# Altium PCB Take 3 85 X 80mm.PcbDoc
Units mm, origin at the board's own origin, x right, y up, seen from the top; angles counter-clockwise.
Board outline 85 x 80 mm, 4 copper layers (Top Layer, Internal Plane 1, Internal Plane 2, Bottom Layer), stack 1.782 mm thick; 108 components, 64 nets, 310 pads, 0 vias.
Unrouted connection lines stored in the file: 207.
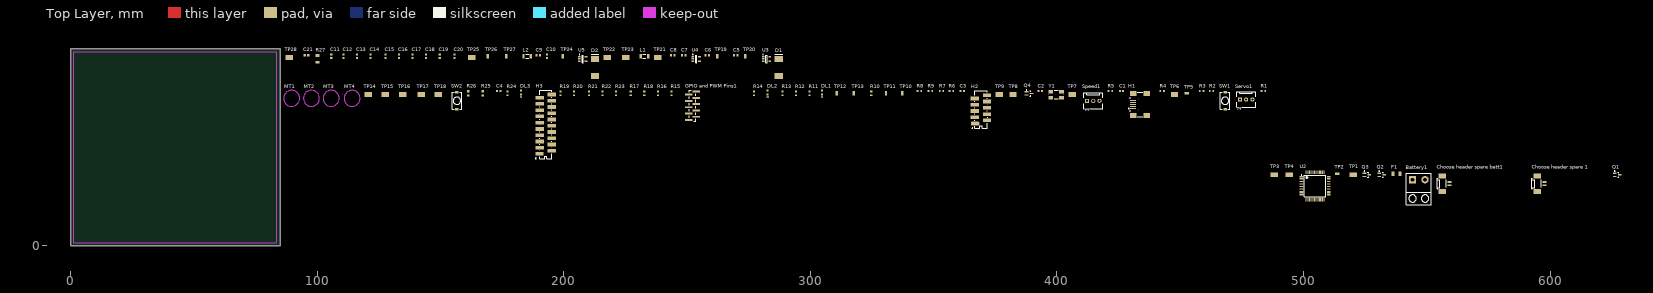
[diagram p0: Top Layer view]
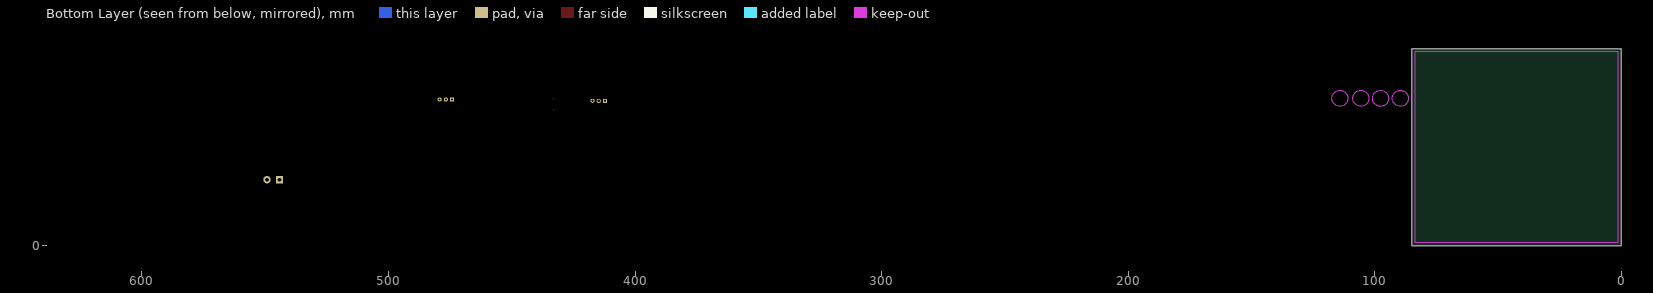
[diagram p1: Bottom Layer view, seen from below]
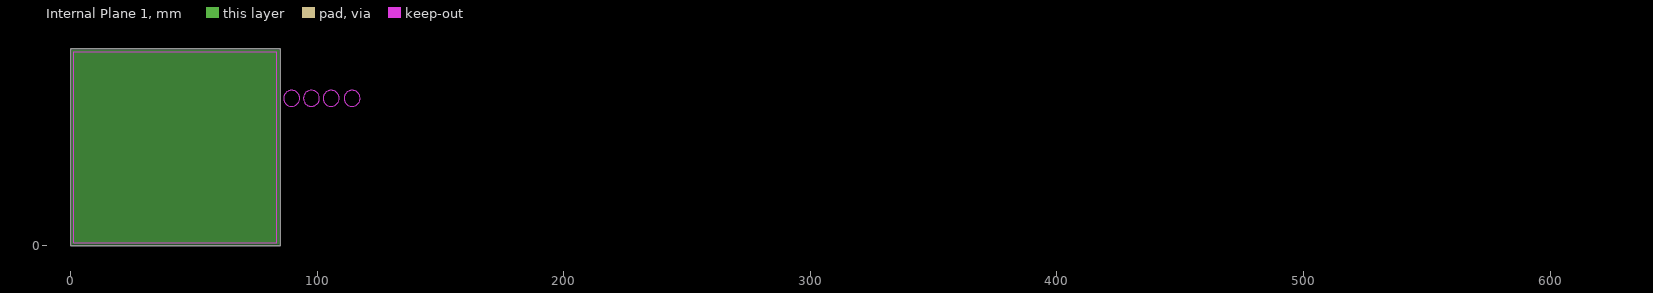
[diagram p2: Internal Plane 1, clearances drawn from the general rule]
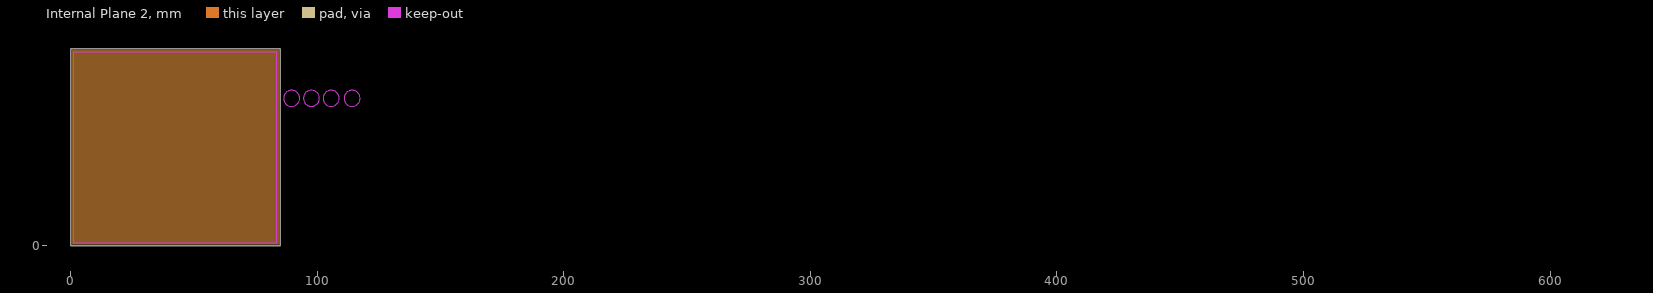
[diagram p3: Internal Plane 2, clearances drawn from the general rule]

## Layer stack, top to bottom
Top Solder: solder mask 0.0102, Solder Resist, Dk 3.5
Top Layer: signal copper 0.0356
Dielectric1: prepreg 0.32, FR-4, Dk 4.8
Internal Plane 1: plane copper 0.0356
Dielectric2: core 1, FR-4, Dk 4.8
Internal Plane 2: plane copper 0.0356
Dielectric3: prepreg 0.32, FR-4, Dk 4.8
Bottom Layer: signal copper 0.0356
Bottom Solder: solder mask 0.0102, Solder Resist, Dk 3.5

## Board outline
0,0 85,0 85,80 0,80

## Design rules (kind name [scope] priority, off if disabled: settings)
Clearance Min_Clearance_Circuit_Labs [All] p1: gap=0.15
DiffPairsRouting [All] p1: maxlimit=0.254 minlimit=0.254 mostfreqgap=0.254 toplayer_minwidth=0.381 toplayer_maxwidth=0.381 toplayer_prefwidth=0.381 bottomlayer_minwidth=0.381 bottomlayer_maxwidth=0.381 bottomlayer_prefwidth=0.381 maxuncoupledlength=12.7
FanoutControl Fanout_BGA [IsBGA] p1 off: bgadir=Out bgaviamode=Centered fanoutstyle=Auto fanoutdirection=Alternating viagrid=0.025 // Fanout_BGA (Default Rule)
HoleSize [All] p1: absolutevalues=TRUE maxlimit=10 minlimit=0.3 maxpercent=80.000 minpercent=20.000
MinimumAnnularRing [All] p1: minimumring=0.1
MinimumSolderMaskSliver [All] p1: minsoldermaskwidth=0.25
NetAntennae [All] p1: netantennaetolerance=1
PasteMaskExpansion [All] p1 off: expansion=0.2
PlaneClearance [All] p1: clearance=0.508
PlaneConnect [All] p1: planeconnectstyle=Relief reliefexpansion=0.508 reliefentries=4 reliefconductorwidth=0.254 reliefairgap=0.254
PolygonConnect [All] p1: connectstyle=Relief reliefconductorwidth=0.254 reliefentries=4 polygonreliefangle="90 Angle" airgapwidth=0.254
RoomDefinition MotorBoard_PowerDistribution [InComponentClass('MotorBoard_PowerDistribution')] p1: confinementstyle=ConfineIn formatcopy=TRUE lockcomponents=FALSE outline 86.2,67.3 289.199,67.3 289.199,80.8 86.2,80.8
RoomDefinition MotorBoard [InComponentClass('MotorBoard')] p2: confinementstyle=ConfineIn formatcopy=TRUE lockcomponents=FALSE outline 85.7,13.3 629.699,13.3 629.699,66.3 85.7,66.3
RoutingVias [All] p1: holewidth=0.5 width=1 viastyle="Through Hole" minholewidth=0.3 minwidth=0.6 maxholewidth=1 maxwidth=2
SMDNeckDown [All] p1 off: percent=50.000
SMDToCorner [All] p1: distance=98425
SMDToPlane [All] p1: distance=1968504
SilkToSolderMaskClearance SilkscreenOverComponentPads [IsPad] p1: minsilkscreentomaskgap=0.254 clearancetoexposedcopper=TRUE
SolderMaskExpansion [All] p1: expansion=0.102
ViasUnderSMD [All] p1: allowed=FALSE
Width [All] p1: maxlimit=2 minlimit=0.15 preferedwidth=0.3
21 further rules are at their usual default settings.

## Classes and differential pairs
net class Y1_Nets: NetC1_2 NetC2_2
net class U5_Nets: +3V3 +5V GND
net class U4_Nets: GND NetU2_38 NetU4_4 "SERVO POWER" VBAT
net class U3_Nets: GND NetD1_1 NetU3_4 VBAT
net class U2_Nets: +3V3 ERASE GND IR "IR SLEEP" LED1 LED2 LED3 NetC1_2 NetC2_2 NetC20_2 NetR2_1 NetR3_2 NetR4_2 NetR6_2 NetR8_2 NetTP7_1 NetTP9_1 NetU2_3 NetU2_4 NetU2_5 NetU2_9 NetU2_11 NetU2_13 NetU2_14 NetU2_19 NetU2_32 NetU2_34 NetU2_37 NetU2_38 NetU2_42 NetU2_59 NetU2_63 NRST P1 P2 P3 PWM1 PWM2 SCL SDA SPARE SPARE2 SPIN1 SPIN2 SPIN3 TCK TDI TDO TMS "USB DETECT" VDDOUT
net class U1_Nets: GND IR NetQ1_2 NetU1_2
net class TP28_Nets: GND
net class TP27_Nets: GND
net class TP26_Nets: GND
net class TP25_Nets: GND
net class TP24_Nets: +3V3
net class TP23_Nets: VDDOUT
net class TP22_Nets: +3V3
net class TP21_Nets: VBUS
net class TP20_Nets: VBAT
net class TP19_Nets: VBAT
net class TP18_Nets: TDI
net class TP17_Nets: TMS
net class TP16_Nets: TCK
net class TP15_Nets: TDO
net class TP14_Nets: NRST
net class TP13_Nets: SDA
net class TP12_Nets: NetR8_2
net class TP11_Nets: GND
net class TP10_Nets: SCL
net class TP9_Nets: NetTP9_1
net class TP8_Nets: USB_P
net class TP7_Nets: NetTP7_1
net class TP6_Nets: USB_N
net class TP5_Nets: NetR2_1
net class TP4_Nets: ERASE
net class TP3_Nets: +3V3
net class TP2_Nets: NetQ1_2
net class TP1_Nets: IR
net class SW2_Nets: GND NRST
net class SW1_Nets: GND NetR2_2
net class Speed1_Nets: GND NetQ4_2 PWM2
net class Servo1_Nets: GND NetR1_1 "SERVO POWER"
net class R27_Nets: NetC20_2 NetC21_2
net class R26_Nets: GND "USB DETECT"
net class R25_Nets: "USB DETECT" VBUS
net class R24_Nets: GND NetDL3_1
net class R23_Nets: +3V3 TDI
net class R22_Nets: +3V3 TMS
net class R21_Nets: +3V3 TCK
net class R20_Nets: +3V3 TDO
net class R19_Nets: +3V3 NRST
net class R18_Nets: "NetGPIO and PWM Pins1_5" SPIN2
net class R17_Nets: "NetGPIO and PWM Pins1_6" SPIN3
net class R16_Nets: GND NetDL2_1
net class R15_Nets: "NetGPIO and PWM Pins1_4" SPIN1
net class R14_Nets: "NetGPIO and PWM Pins1_3" P3
net class R13_Nets: "NetGPIO and PWM Pins1_2" P2
net class R12_Nets: "NetGPIO and PWM Pins1_1" P1
net class R11_Nets: GND NetDL1_1
net class R10_Nets: GND NetR8_2
net class R9_Nets: NetQ4_3 VBAT
net class R8_Nets: NetR8_2 VBAT
net class R7_Nets: NetR6_2 SDA
net class R6_Nets: NetR6_2 SCL
net class R5_Nets: NetR5_1 PWM2
net class R4_Nets: NetR4_2 USB_N
net class R3_Nets: NetR3_2 USB_P
net class R2_Nets: NetR2_1 NetR2_2
net class R1_Nets: NetR1_1 PWM1
net class Q4_Nets: NetQ4_1 NetQ4_2 NetQ4_3
net class Q3_Nets: "NetChoose header spare batt1_2" SPARE VBAT
net class Q2_Nets: "NetChoose header spare 1_2" "SERVO POWER" SPARE2
net class Q1_Nets: +3V3 "IR SLEEP" NetQ1_2
net class L2_Nets: NetC20_2 VDDOUT
net class L1_Nets: NetD2_1 VBUS
net class H3_Nets: +3V3 GND NetH3_3 NetH3_11 NetH3_17 NetH3_19 NRST TCK TDI TDO TMS
net class H2_Nets: +5V GND NetH2_3 NetH2_4 NetH2_9 NetH2_10 SCL SDA
net class H1_Nets: GND NetH1_4 USB_N USB_P VBUS
net class "GPIO and PWM Pins1_Nets": GND "NetGPIO and PWM Pins1_1" "NetGPIO and PWM Pins1_2" "NetGPIO and PWM Pins1_3" "NetGPIO and PWM Pins1_4" "NetGPIO and PWM Pins1_5" "NetGPIO and PWM Pins1_6"
net class F1_Nets: NetBattery1_1 VBAT
net class DL3_Nets: LED3 NetDL3_1
net class DL2_Nets: LED2 NetDL2_1
net class DL1_Nets: LED1 NetDL1_1
net class D2_Nets: +5V NetD2_1
net class D1_Nets: +5V NetD1_1
net class "Choose header spare batt1_Nets": GND "NetChoose header spare batt1_2"
net class "Choose header spare 1_Nets": GND "NetChoose header spare 1_2"
net class C21_Nets: GND NetC21_2
net class C20_Nets: GND NetC20_2
net class C19_Nets: GND VDDOUT
net class C18_Nets: GND VDDOUT
net class C17_Nets: GND VDDOUT
net class C16_Nets: GND VDDOUT
net class C15_Nets: +3V3 GND
net class C14_Nets: +3V3 GND
net class C13_Nets: +3V3 GND
net class C12_Nets: +3V3 GND
net class C11_Nets: +3V3 GND
net class C10_Nets: +3V3 GND
net class C9_Nets: +5V GND
net class C8_Nets: GND "SERVO POWER"
net class C7_Nets: +5V GND
net class C6_Nets: GND VBAT
net class C5_Nets: GND VBAT
net class C4_Nets: +3V3 GND
net class C3_Nets: +5V GND
net class C2_Nets: GND NetC2_2
net class C1_Nets: GND NetC1_2
net class Battery1_Nets: GND NetBattery1_1
component class MotorBoard: Battery1 C1 C2 C3 C4 "Choose header spare 1" "Choose header spare batt1" DL1 DL2 DL3 F1 "GPIO and PWM Pins1" H1 H2 H3 MT1 MT2 MT3 MT4 Q1 Q2 Q3 Q4 R1 R2 R3 R4 R5 R6 R7 R8 R9 R10 R11 R12 R13 R14 R15 R16 R17 R18 R19 R20 R21 R22 R23 R24 R25 R26 Servo1 Speed1 SW1 SW2 TP1 TP2 TP3 TP4 TP5 TP6 TP7 TP8 TP9 TP10 TP11 TP12 TP13 TP14 TP15 TP16 TP17 TP18 U1 U2 Y1
component class MotorBoard_PowerDistribution: C5 C6 C7 C8 C9 C10 C11 C12 C13 C14 C15 C16 C17 C18 C19 C20 C21 D1 D2 L1 L2 R27 TP19 TP20 TP21 TP22 TP23 TP24 TP25 TP26 TP27 TP28 U3 U4 U5
differential pair USB: +USB_P -USB_N

## Components (designator, comment, footprint, x,y, rotation, side; value= is the part's Value field where it differs from the comment)
Battery1 "JA_TERM_BLK_HDR_2 PIN" TMHDR2 544.199,26.8 r0 top
C1 "10pF" CAPC1608L 426.199,62.8 r0 top
C2 "10pF" CAPC1608L 393.199,62.8 r0 top
C3 "100nF" CAPC1608L 361.699,62.8 r0 top
C4 "100nF" CAPC1608L 173.7,62.8 r0 top
C5 "10uF" CAPC1608L 269.699,77.3 r0 top
C6 "10uF" CAPC1608L 258.199,77.3 r0 top
C7 "10uF" CAPC1608L 248.699,77.3 r0 top
C8 "10uF" CAPC1608L 244.199,77.3 r0 top
C9 "10uF" CAPC1608L 189.7,77.3 r0 top
C10 "10uF" CAPC1608L 193.2,76.8 r90 top
C11 "100nF" CAPC1608L 105.7,76.8 r90 top
C12 "100nF" CAPC1608L 110.7,76.8 r90 top
C13 "100nF" CAPC1608L 116.2,76.8 r90 top
C14 "100nF" CAPC1608L 121.7,76.8 r90 top
C15 "100nF" CAPC1608L 127.7,76.8 r90 top
C16 "100nF" CAPC1608L 133.2,76.8 r90 top
C17 "100nF" CAPC1608L 138.7,76.8 r90 top
C18 "100nF" CAPC1608L 144.2,76.8 r90 top
C19 "100nF" CAPC1608L 149.7,76.8 r90 top
C20 "100nF" CAPC1608L 155.7,76.8 r90 top
C21 "4.7uF" CAPC1608N 95.7,77.3 r0 top
"Choose header spare 1" "" SD-53261-0219 597.699,25.8 r90 top
"Choose header spare batt1" "Value" SD-53261-0219 559.199,25.8 r90 top
D1 "VS-30BQ015TRPBF" SMC 287.199,72.3 r90 top
D2 "VS-30BQ015TRPBF" SMC 212.699,72.3 r90 top
DL1 "Dark Green" WL-SMCW0603 304.699,61.3 r90 top
DL2 "Yellow" WL-SMCW0603 282.699,61.3 r90 top
DL3 "Red" WL-SMCW0603 182.7,61.3 r90 top
F1 "5A" RESC3216N 537.699,29.3 r0 top
"GPIO and PWM Pins1" "HDR SIL SMT" M52-040000P1045 252.199,56.8 r90 top
H1 "JS_USB_MINI_B" USB/SM0.8-6H5 438.699,57.3 r0 top
H2 "I2C" 188275-10 369.199,55.3 r90 top
H3 "ARM JTAG" 188275-20 192.7,49.3 r90 top
L1 "Ferrite Bead" INDC3216L 232.699,76.8 r0 top
L2 "Ferrite Bead" INDC3216L 185.2,76.8 r0 top
MT1 "M3.2 NPTH" MNT-HOLE_3.2mm_NPTH 89.7,59.8 r0 top
MT2 "M3.2 NPTH" MNT-HOLE_3.2mm_NPTH 97.7,59.8 r0 top
MT3 "M3.2 NPTH" MNT-HOLE_3.2mm_NPTH 105.7,59.8 r0 top
MT4 "M3.2 NPTH" MNT-HOLE_3.2mm_NPTH 114.2,59.8 r0 top
Q1 "BC817W" SOT323_M 627.199,28.8 r0 top
Q2 "BC817W" SOT323_M 531.699,28.8 r0 top
Q3 "BC817W" SOT323_M 525.699,28.8 r0 top
Q4 "BC817W" SOT323_M 388.699,61.8 r0 top
R1 "220R" RESC1608L 483.699,62.8 r0 top
R2 "2K2" RESC1608L 462.699,62.8 r0 top
R3 "27R" RESC1608L 458.699,62.8 r0 top
R4 "27R" RESC1608L 442.699,62.8 r0 top
R5 "220R" RESC1608L 421.699,62.8 r0 top
R6 "2K2" RESC1608L 357.199,62.8 r0 top
R7 "2K2" RESC1608L 353.199,62.8 r0 top
R8 "160K" RESC1608L 344.199,62.8 r0 top
R9 "220R" RESC1608L 348.699,62.8 r0 top
R10 "#NAME?" RESC1608L 324.699,61.8 r90 top
R11 "62R" RESC1608L 299.699,61.8 r90 top
R12 "220R" RESC1608L 294.199,61.8 r90 top
R13 "220R" RESC1608L 288.699,61.8 r90 top
R14 "220R" RESC1608L 277.199,61.8 r90 top
R15 "220R" RESC1608L 243.699,61.8 r90 top
R16 "220R" RESC1608L 238.199,61.8 r90 top
R17 "220R" RESC1608L 227.199,61.8 r90 top
R18 "220R" RESC1608L 232.699,61.8 r90 top
R19 "100K" RESC1608L 198.7,61.8 r90 top
R20 "100K" RESC1608L 204.199,61.8 r90 top
R21 "100K" RESC1608L 210.199,61.8 r90 top
R22 "100K" RESC1608L 215.699,61.8 r90 top
R23 "100K" RESC1608L 221.199,61.8 r90 top
R24 "220R" RESC1608L 177.2,61.8 r90 top
R25 "27K" RESC1608N 167.2,61.8 r90 top
R26 "47K" RESC1608N 161.2,61.8 r90 top
R27 "1R" RESC3216L 100.2,75.8 r90 top
Servo1 "3 Pin Molex KK Hdr" MOLEX_KK_3_HDR 474.199,59.3 r0 top
Speed1 "3 Pin Molex KK Hdr" MOLEX_KK_3_HDR 412.199,58.8 r0 top
SW1 "Sleep/Wake Up" KSR211G 468.199,55.3 r90 top
SW2 "Reset" KSR211G 156.7,55.3 r90 top
TP1 "Gnd" TP_0805 520.199,28.8 r0 top
TP2 "TP_0603" TP_0603 513.699,29.3 r0 top
TP3 "3V3" TP_0805 488.199,28.8 r0 top
TP4 "Erase" TP_0805 494.199,28.8 r0 top
TP5 "TP_0603" TP_0603 452.699,61.8 r0 top
TP6 "USB_N" TP_0805 447.699,61.3 r0 top
TP7 "PA15" TP_0805 406.199,61.3 r0 top
TP8 "USB_P" TP_0805 382.199,61.3 r0 top
TP9 "PA11" TP_0805 376.699,61.3 r0 top
TP10 "TP_0603" TP_0603 337.199,61.8 r90 top
TP11 "TP_0603" TP_0603 330.699,61.8 r90 top
TP12 "TP_0603" TP_0603 310.699,61.8 r90 top
TP13 "TP_0603" TP_0603 317.699,61.8 r90 top
TP14 "nRST" TP_0805 120.7,61.3 r0 top
TP15 "TDO" TP_0805 127.7,61.3 r0 top
TP16 "TCK" TP_0805 134.7,61.3 r0 top
TP17 "TMS" TP_0805 142.2,61.3 r0 top
TP18 "TDI" TP_0805 149.2,61.3 r0 top
TP19 "TP_0603" TP_0603 262.199,76.8 r90 top
TP20 "TP_0603" TP_0603 273.699,76.8 r90 top
TP21 "V_Bus" TP_0805 238.199,76.3 r0 top
TP22 "3V3" TP_0805 217.699,76.3 r0 top
TP23 "VddOut" TP_0805 225.199,76.3 r0 top
TP24 "TP_0603" TP_0603 199.699,76.8 r90 top
TP25 "Gnd" TP_0805 162.7,76.3 r0 top
TP26 "TP_0603" TP_0603 169.2,76.8 r90 top
TP27 "TP_0603" TP_0603 176.7,76.8 r90 top
TP28 "Gnd" TP_0805 88.7,76.3 r0 top
U2 "ATSAM4S8BA-ANR" LQFP64_L 504.699,24.3 r0 top
U3 "UC385 7.5 to 6 (max)" SOT95P280X145-5N 282.199,75.8 r0 top
U4 "UC385 7.5 to 6 (max)" SOT95P280X145-5N 253.699,75.8 r0 top
U5 "TLV70233DBVR" SOT95P280X145-5N 207.699,75.8 r0 top
Y1 "18.432MHz" 6.0X3.5-4 399.699,61.3 r0 top

## Footprints (in the part's own frame and the unit in brackets; to place one, negate y for a bottom-side part, rotate by r counter-clockwise, add the part's x,y. Pads: shape width x height; smd on the part's side, far side on the other; paste and mask are expansions set on the pad)
6.0X3.5-4 [mm] "4 SMD 6.0X3.5 mm No Lead Crystal"
  rect 1.9x1.4 smd: 1(-2.2,-1.2) 2(2.2,-1.2) 3(2.2,1.2) 4(-2.2,1.2)
  silkscreen extent -3,-1.75 3,1.75, body extent -3,-1.75 3,1.75, height 1.2
188275-10 [mm] "MicroMatch Ribbon Connector 10 way"
  rrect50% 1.5x3.4 smd: 1(-5.724,2.385)
  rect 1.5x3.4 smd: 2(-4.445,-2.461) 3(-3.175,2.461) 4(-1.905,-2.461) 5(-0.635,2.461) 6(0.635,-2.461) 7(1.905,2.461) 8(3.175,-2.461) 9(4.445,2.461) 10(5.715,-2.461)
  silkscreen extent -7.74,-2.55 7.62,3.57, body extent -7.62,-2.5 7.64,2.43, height 8.45
188275-20 [mm] "MicroMatch Ribbon Connector 20 way"
  rrect50% 1.5x3.4 smd: 1(-12,2.5)
  rect 1.5x3.4 smd: 2(-10.795,-2.461) 3(-9.525,2.461) 4(-8.255,-2.461) 5(-6.985,2.461) 6(-5.715,-2.461) 7(-4.445,2.461) 8(-3.175,-2.461) 9(-1.905,2.461) 10(-0.635,-2.461) 11(0.635,2.461) 12(1.905,-2.461) 13(3.175,2.461) 14(4.445,-2.461) 15(5.715,2.461) 16(6.985,-2.461) 17(8.255,2.461) 18(9.525,-2.461) 19(10.795,2.461) 20(12.065,-2.461)
  silkscreen extent -14.06,-2.54 13.83,4.16, body extent -13.96,-2.54 13.93,2.46, height 8.45
CAPC1608L [mm] "Chip Capacitor, Body 1.6x0.8mm, IPC High Density"
  rect 0.8x0.9 smd: 1(-0.7,0) 2(0.7,0)
  body extent -0.87,-0.48 0.87,0.48, height 0.85
CAPC1608N [mm] "Chip Capacitor, Body 1.6x0.8mm, IPC Medium Density"
  rect 1x1 smd: 1(-0.8,0) 2(0.8,0)
  body extent -0.87,-0.48 0.87,0.48, height 0.85
INDC3216L [mm] "Chip Inductor, Body 3.2x1.6mm, IPC High Density"
  rect 1x1.8 smd: 1(-1.5,0) 2(1.5,0)
  silkscreen extent -0.55,-0.8 0.55,0.8, body extent -1.75,-0.95 1.75,0.95, height 1.9
KSR211G [mm] "Subminature Tactile Switch in SMT"
  rect 1x1.4 smd: 1(0,0) 2(7,0)
  silkscreen extent 0,-1.9 7,2, body extent 0,-1.9 7,2, height 4.25
LQFP64_L [mm] "Thin QFP, 64-Leads, Body 10x10mm, Pitch 0.5mm, IPC High Density"
  oval 1.55x0.25 smd mask+0.07: 1(-5.525,3.75) 2(-5.525,3.25) 3(-5.525,2.75) 4(-5.525,2.25) 5(-5.525,1.75) 6(-5.525,1.25) 7(-5.525,0.75) 8(-5.525,0.25) 9(-5.525,-0.25) 10(-5.525,-0.75) 11(-5.525,-1.25) 12(-5.525,-1.75) 13(-5.525,-2.25) 14(-5.525,-2.75) 15(-5.525,-3.25) 16(-5.525,-3.75) 33(5.525,-3.75) 34(5.525,-3.25) 35(5.525,-2.75) 36(5.525,-2.25) 37(5.525,-1.75) 38(5.525,-1.25) 39(5.525,-0.75) 40(5.525,-0.25) 41(5.525,0.25) 42(5.525,0.75) 43(5.525,1.25) 44(5.525,1.75) 45(5.525,2.25) 46(5.525,2.75) 47(5.525,3.25) 48(5.525,3.75)
  oval 0.25x1.55 smd mask+0.07: 17(-3.75,-5.525) 18(-3.25,-5.525) 19(-2.75,-5.525) 20(-2.25,-5.525) 21(-1.75,-5.525) 22(-1.25,-5.525) 23(-0.75,-5.525) 24(-0.25,-5.525) 25(0.25,-5.525) 26(0.75,-5.525) 27(1.25,-5.525) 28(1.75,-5.525) 29(2.25,-5.525) 30(2.75,-5.525) 31(3.25,-5.525) 32(3.75,-5.525) 49(3.75,5.525) 50(3.25,5.525) 51(2.75,5.525) 52(2.25,5.525) 53(1.75,5.525) 54(1.25,5.525) 55(0.75,5.525) 56(0.25,5.525) 57(-0.25,5.525) 58(-0.75,5.525) 59(-1.25,5.525) 60(-1.75,5.525) 61(-2.25,5.525) 62(-2.75,5.525) 63(-3.25,5.525) 64(-3.75,5.525)
  silkscreen extent -5.65,-4.35 4.35,4.55, body extent -5,-5 5,5, height 1.6
M52-040000P1045 [mm] "1.27mm SIL SMT 10 way Pin Header"
  rect 0.74x3 smd: 1(-5.724,1.51) 2(-4.452,-1.51) 3(-3.18,1.51) 4(-1.908,-1.51) 5(-0.636,1.51) 6(0.636,-1.51) 7(1.908,1.51) 8(3.18,-1.51) 9(4.531,1.51) 10(5.724,-1.51)
  silkscreen extent -6.36,-1.27 6.36,1.27, body extent -6.36,-1.27 6.36,1.27, height 7.77
MNT-HOLE_3.2mm_NPTH [mm] "Mounting Hole 3.2mm non plated"
  round 0 hole 3.2 unplated: 1(0,0)
  Keep-Out Layer circle w0.254: c0,0 r3.25
MOLEX_KK_3_HDR [mil] "MOLEX_KK_3_HDR"
  rect 65x65 hole 35.43: 1(0,0)
  round 65 hole 35.43: 2(100,0) 3(200,0)
  silkscreen extent -50,-125 250,125, body extent -44,-120 244,119, height 630
RESC1608L [mm] "Chip Resistor, Body 1.6x0.8mm, IPC High Density"
  rect 0.7x0.9 smd: 1(-0.75,0) 2(0.75,0)
  body extent -0.85,-0.48 0.85,0.48, height 0.9
RESC1608N [mm] "Chip Resistor, Body 1.6x0.8mm, IPC Medium Density"
  rect 0.9x1 smd: 1(-0.85,0) 2(0.85,0)
  body extent -0.85,-0.48 0.85,0.48, height 0.6
RESC3216L [mm] "Chip Resistor, Body 3.1x1.6mm, IPC High Density"
  rect 1.1x1.7 smd: 1(-1.35,0) 2(1.35,0)
  body extent -1.68,-0.87 1.68,0.87, height 2.54
RESC3216N [mm] "Chip Resistor, Body 3.2x1.6mm, IPC Medium Density"
  rect 1.3x1.8 smd: 1(-1.45,0) 2(1.45,0)
  body extent -1.68,-0.87 1.68,0.87, height 0.71
SD-53261-0219 [mm] "Molex Pico Blade 2 Pos Horiz SMD Header"
  rect 0.8x1.6 smd: 1(0,0) 2(-1.25,0)
  rect 2.1x3 smd: M(-3.8,2.9) M(2.55,2.9)
  silkscreen extent -2.75,1.25 1.5,5.05, body extent -2.66,1.13 1.41,4.95, height 3.45
SMC [mm] "DO-214-AB/SMC; 2 C-Bend Leads; Body 7.9 x 5.9 mm, inc. leads (LxW)"
  rect 2.4x3.3 smd: 1(-3.475,0) 2(3.475,0)
  silkscreen extent 5.43,-1.6 5.43,1.6
SOT95P280X145-5N [mm] "SOT23, 5-Leads, Body 2.90x2.80mm, Pitch 0.95mm, IPC Medium Density"
  rect 1.05x0.6 smd: 1(-1.35,0.95) 2(-1.35,0) 3(-1.35,-0.95) 4(1.35,-0.95) 5(1.35,0.95)
  silkscreen extent -1.47,-1.55 0.25,1.92, body extent -0.87,-1.52 0.87,1.53, height 1.45
SOT323_M [mm] "SOT323, 3-Leads, Body 2.0x1.3mm, Pitch 0.65mm, Lead Span 2.1mm, IPC Low Density"
  rect 1.5x0.5 smd: 1(-1,0.65) 2(-1,-0.65) 3(1,0)
  silkscreen extent -1.12,-1.1 0.7,1.57, body extent -0.7,-1.1 0.7,1.1, height 1.1
TMHDR2 [mm] "5.08mm Pluggable Terminal Header"
  rect 3x3 hole 1.5: 1(0,0)
  round 3 hole 1.5: 2(5.08,0)
  silkscreen extent -2.54,-10.16 7.62,2.54, body extent -2.43,-10.07 7.51,2.42, height 7.8
TP_0603 [mm] "TestPoint 0603"
  rect 1.8x1 smd: 1(0,0)
  body extent -1,-0.6 1,0.6, height 0.9
TP_0805 [mm] "TestPoint SMD"
  rect 3x2 smd: 1(0,0)
  body extent -1.5,-1 1.5,1.1, height 1.4
USB/SM0.8-6H5 [mm] "Connector; USB2.0, Type B, SM; 5 Position; Right Angle"
  rect 2.3x0.5 smd mask+0.07: 1(-7.85,-1.6) 2(-7.85,-0.8) 3(-7.85,0) 4(-7.85,0.8) 5(-7.85,1.6)
  rect 2.5x2 smd: 6(-7.75,4.45) 7(-2.25,4.45) 8(-7.75,-4.45) 9(-2.25,-4.45)
  round 0.6 hole 0.9 unplated: MH1(-5.25,2.2) MH2(-5.25,-2.2)
  silkscreen extent -9.67,-4.95 -3.95,4.95, body extent -8.9,-4.95 0.7,4.95, height 3.9
WL-SMCW0603 [mm] "2.4 x 0.8 x 0.7mm LED"
  rect 0.8x0.8 smd: 1(0,0) 2(1.6,0)
  silkscreen extent -0.85,-0.35 -0.85,0.35

## Part data
Battery1: "TERM_BLK_HEADER 5.08mm 2 Pos R/A Thru Hole"
C1 C2: library part CC_10pF_0603, "CAP CER 10pF COG/NPO 50V 0603"
C3 C4 C11 C12 C13 C14 C15 C16 C17 C18 C19 C20: library part CC_100nF_0603, "CAP CER 100nF X7R +-10% 50V 0603"
C5 C6 C7 C8 C9 C10: library part CC_10uF_0603, "CAP CER 10UF X5R +-20% 10V 0603"
C21: library part CC_4.7uF_0603, "CAP CER 4.7uF X5R +-20%  10V 0603"
"Choose header spare 1": library part JB_53261-02
"Choose header spare batt1": library part JB_53261-02, "Header_Horiz_2Pos_1.25mm_125V@1A_SMT"
D1 D2: library part DS_VS-30BQD015TRPBF, "DIODE SCHOTTKY 15V 3A SMC"
DL1: library part DL_150060GS75000, "LED Dk Green 430mcd 0603 SMD"
DL2: library part DL_150060YS75000, "LED Yellow 120mcd 0603 SMD"
DL3: library part DL_150060RS75000, "LED Red 250mcd 0603 SMD"
F1: library part FS_Fuse_5.0A, "Fuse 5.0A Very Fast Acting 1206 SMD"
"GPIO and PWM Pins1": library part JB_M52H_10_1.27, "Header 1.27mm Pitch SIL 10 Way SMT"
H1: library part JS_USB_MINI_B_SMT, "USB 2.0, Right Angle, SMT, B Type, Receptacle, 5 Position,"
H2: library part JB_HDR_IDC_5X2_VERT, "IDC Header, 1,27mm, 10-Pin, Vert, SMT"
H3: library part JB_HDR_IDC_10X2_VERT, "IDC Header, 1,27mm, 20-Pin, Vert, SMT"
L1 L2: library part IN_Ferrite-Bead, "Ferrite Bead, Rdc 0.3R, Z100MHZ 600R, Imax 1A, SMD 1206"
MT1 MT2 MT3 MT4: library part MC_M3.2_HOLE, "Fixing M3.2 Mount Hole NPTH"
Q1 Q2 Q3 Q4: library part TB_BC817W, "NPN GP Bipolar Transistor 45V 500mA SOT323"
R1 R5 R9 R12 R13 R14 R15 R16 R17 R18 R24: library part RS_220R, "RES 220 OHM 1/10W 5% 0603 SMD"
R2 R6 R7: library part RS_2K2, "RES 2.2K OHM 1/10W 5% 0603 SMD"
R3 R4: library part RS_27R, "RES 27 OHM 1/10W 5% 0603 SMD"
R8: library part RS_160K, "RES 160K OHM 1/10W 5% 0603 SMD"
R10: library part RS_130K, "RES 130K OHM 1/10W 5% 0603 SMD"
R11: library part RS_62R, "RES 62 OHM 1/10W 5% 0603 SMD"
R19 R20 R21 R22 R23: library part RS_100K, "RES 100K OHM 1/10W 5% 0603 SMD"
R25: library part RS_27K, "RES 27K OHM 1/10W 5% 0603 SMD"
R26: library part RS_47K, "RES 47.0K OHM 1/10W 5% 0603 SMD"
R27: library part RT_1R, "RES 1R OHM 1/4W 5% 1206 SMD"
Servo1 Speed1: library part JA_MOLEX_KK_3POS, "CONN HEADER 3POS 2.54mm VERT_Thru Hole"
SW1 SW2: library part "WS_KSR211G LFS", "SWITCH TACTILE SPST-NO SMD"
TP1 TP3 TP4 TP6 TP7 TP8 TP9 TP14 TP15 TP16 TP17 TP18 TP21 TP22 TP23 TP25 TP28: library part TP_0805, "Test Point 2.0X0.9X1.2mm SMD"
TP2 TP5 TP10 TP11 TP12 TP13 TP19 TP20 TP24 TP26 TP27: "Test Point 1.65X0.9X1.2mm SMD"
U2: library part SE_ATSAM4S16BA-MU, "IC MCU 32BIT 512KB FLASH 64LQFP"
U3 U4 U5: library part SV_TLV70233DBVR, "IC REG LDO 3.3V 0.3A SOT23-5"
Y1: library part XT_CRYSTAL_18.432MHz_13pF, "18.432 MHZ 4PF  6.0X3.5mm SMD"

## Nets (pads, with @x,y where several pads share a name; then routed paths per layer and width w, separated by ;. In a path a pad name is that pad's centre, name@x,y a point inside that pad or via, vN(x,y) a via of type N, cw(c..) or ccw(c..) an arc to the next point about the centre after c; other vN are vias at no path point)
+3V3: C4.2 C10.1 C11.2 C12.2 C13.2 C14.2 C15.2 H3.1 H3.2 Q1.3 R19.2 R20.2 R21.2 R22.2 R23.2 TP3.1 TP22.1 TP24.1 U2.1 U2.7 U2.18 U2.45 U2.58 U5.5
+5V: C3.2 C7.1 C9.1 D1.2 D2.2 H2.1 U5.1 U5.3
ERASE: TP4.1 U2.55
GND: "Choose header spare 1.1" "Choose header spare batt1.1" "GPIO and PWM Pins1.7" "GPIO and PWM Pins1.8" "GPIO and PWM Pins1.9" "GPIO and PWM Pins1.10" Battery1.2 C1.1 C2.1 C3.1 C4.1 C5.1 C6.2 C7.2 C8.2 C9.2 C10.2 C11.1 C12.1 C13.1 C14.1 C15.1 C16.1 C17.1 C18.1 C19.1 C20.1 C21.1 H1.5 H1.6 H1.7 H1.8 H1.9 H2.2 H2.6 H2.8 H3.4 H3.6 H3.8 H3.10 H3.12 H3.14 H3.16 H3.18 H3.20 R10.1 R11.2 R16.2 R24.2 R26.1 Servo1.3 Speed1.3 SW1.2 SW2.2 TP11.1 TP25.1 TP26.1 TP27.1 TP28.1 U2.2 U2.17 U2.40 U2.46 U2.50 U2.60 U3.2 U4.2 U5.2 U5.4
IR: TP1.1 U2.10
"IR SLEEP": Q1.1 U2.41
LED1: DL1.2 U2.48
LED2: DL2.2 U2.47
LED3: DL3.2 U2.44
NetBattery1_1: Battery1.1 F1.1
NetC1_2: C1.2 U2.62 Y1.3
NetC2_2: C2.2 U2.61 Y1.1
NetC20_2: C20.2 L2.1 R27.2 U2.64
NetC21_2: C21.2 R27.1
"NetChoose header spare 1_2": "Choose header spare 1.2" Q2.2
"NetChoose header spare batt1_2": "Choose header spare batt1.2" Q3.2
NetD1_1: D1.1 U3.5
NetD2_1: D2.1 L1.2
NetDL1_1: DL1.1 R11.1
NetDL2_1: DL2.1 R16.1
NetDL3_1: DL3.1 R24.1
"NetGPIO and PWM Pins1_1": "GPIO and PWM Pins1.1" R12.2
"NetGPIO and PWM Pins1_2": "GPIO and PWM Pins1.2" R13.1
"NetGPIO and PWM Pins1_3": "GPIO and PWM Pins1.3" R14.1
"NetGPIO and PWM Pins1_4": "GPIO and PWM Pins1.4" R15.1
"NetGPIO and PWM Pins1_5": "GPIO and PWM Pins1.5" R18.1
"NetGPIO and PWM Pins1_6": "GPIO and PWM Pins1.6" R17.1
NetQ1_2: Q1.2 TP2.1
NetQ4_2: Q4.2 Speed1.2
NetQ4_3: Q4.3 R9.1
NetR1_1: R1.1 Servo1.1
NetR2_1: R2.1 TP5.1 U2.16
NetR2_2: R2.2 SW1.1
NetR3_2: R3.2 U2.57
NetR4_2: R4.2 U2.56
NetR6_2: R6.2 R7.2 U2.31
NetR8_2: R8.2 R10.2 TP12.1 U2.6
NetTP7_1: TP7.1 U2.20
NetTP9_1: TP9.1 U2.28
NetU2_38: U2.38 U4.3
NRST: H3.15 R19.1 SW2.1 TP14.1 U2.39
P1: R12.1 U2.25
P2: R13.2 U2.23
P3: R14.2 U2.15
PWM1: R1.2 U2.21
PWM2: R5.2 Speed1.1 U2.22
SCL: H2.5 R6.1 TP10.1 U2.36
SDA: H2.7 R7.1 TP13.1 U2.43
"SERVO POWER": C8.1 Q2.3 Servo1.2 U4.5
SPARE: Q3.1 U2.52
SPARE2: Q2.1 U2.26
SPIN1: R15.2 U2.27
SPIN2: R18.2 U2.29
SPIN3: R17.2 U2.30
TCK: H3.9 R21.1 TP16.1 U2.53
TDI: H3.5 R23.1 TP18.1 U2.33
TDO: H3.13 R20.1 TP15.1 U2.49
TMS: H3.7 R22.1 TP17.1 U2.51
"USB DETECT": R25.1 R26.2 U2.35
USB_N: H1.2 R4.1 TP6.1
USB_P: H1.3 R3.1 TP8.1
VBAT: C5.2 C6.1 F1.2 Q3.3 R8.1 R9.2 TP19.1 TP20.1 U3.1 U3.3 U4.1
VBUS: H1.1 L1.1 R25.2 TP21.1
VDDOUT: C16.2 C17.2 C18.2 C19.2 L2.2 TP23.1 U2.8 U2.12 U2.24 U2.54
pads on no net: "Choose header spare 1.M" "Choose header spare batt1.M" H1.4 H1.MH1 H1.MH2 H2.3 H2.4 H2.9 H2.10 H3.3 H3.11 H3.17 H3.19 MT1.1 MT2.1 MT3.1 MT4.1 Q4.1 R5.1 U2.3 U2.4 U2.5 U2.9 U2.11 U2.13 U2.14 U2.19 U2.32 U2.34 U2.37 U2.42 U2.59 U2.63 U3.4 U4.4 Y1.2 Y1.4

## Polygon pours and split planes (outlines as drawn)
no net on Internal Plane 1 (split plane): 84.49,0.51 0.51,0.51 0.51,79.49 84.49,79.49
no net on Internal Plane 2 (split plane): 84.49,0.51 0.51,0.51 0.51,79.49 84.49,79.49

## Keep-outs
Keep-Out Layer:
  lines w0.3: 1.3,1.3 83.7,1.3 83.7,78.7 1.3,78.7 1.3,1.3

## Silkscreen, mask and mechanical layers (free items; w line width, h text height)
PCB Boundary:
  the board outline again, w0.3
Drill Drawing:
  text ".LEGEND" at 90.08,5.08 h1.52
  text "Drill Drawing." at 90.08,2.54 h1.52

## Dimensions
0,0 to 0,80 on Dimension
0,0 to 85,0 on Dimension

## Text inside footprints (layer, text, board x,y; h text height)
H1: Dimension "PCB Edge" at 439.131,53.263 h0.25 r90
Servo1: Top Overlay "1" at 474.834,54.855 h1.52 r90
Speed1: Top Overlay "1" at 412.834,54.355 h1.52 r90